# Altium PCB ROLETA2-A1.PcbDoc
Units mm, origin at the board's own origin, x right, y up, seen from the top; angles counter-clockwise.
Board outline 66 x 53 mm, 2 copper layers (Top Layer, Bottom Layer); 71 components, 62 nets, 252 pads, 65 vias.
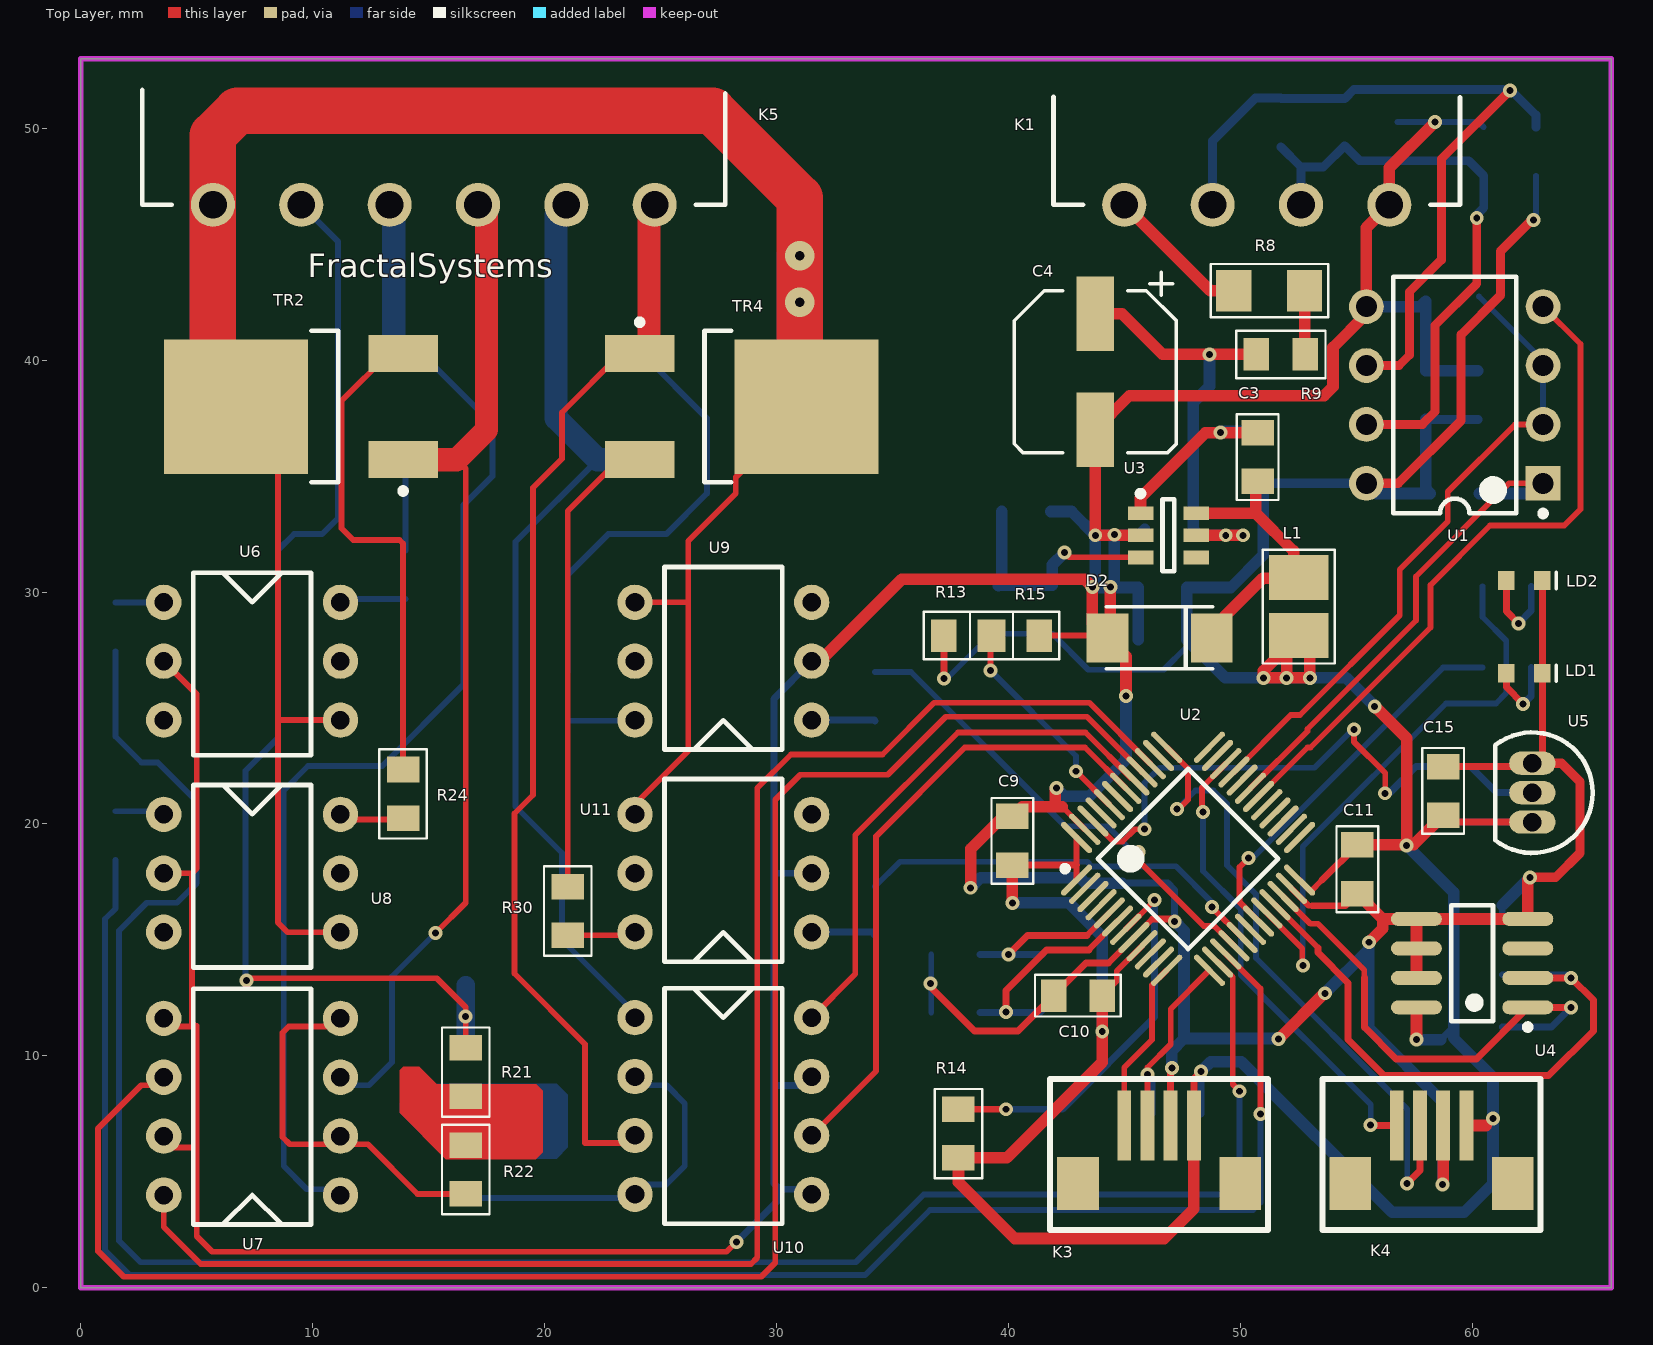
[diagram p0: Top Layer view]
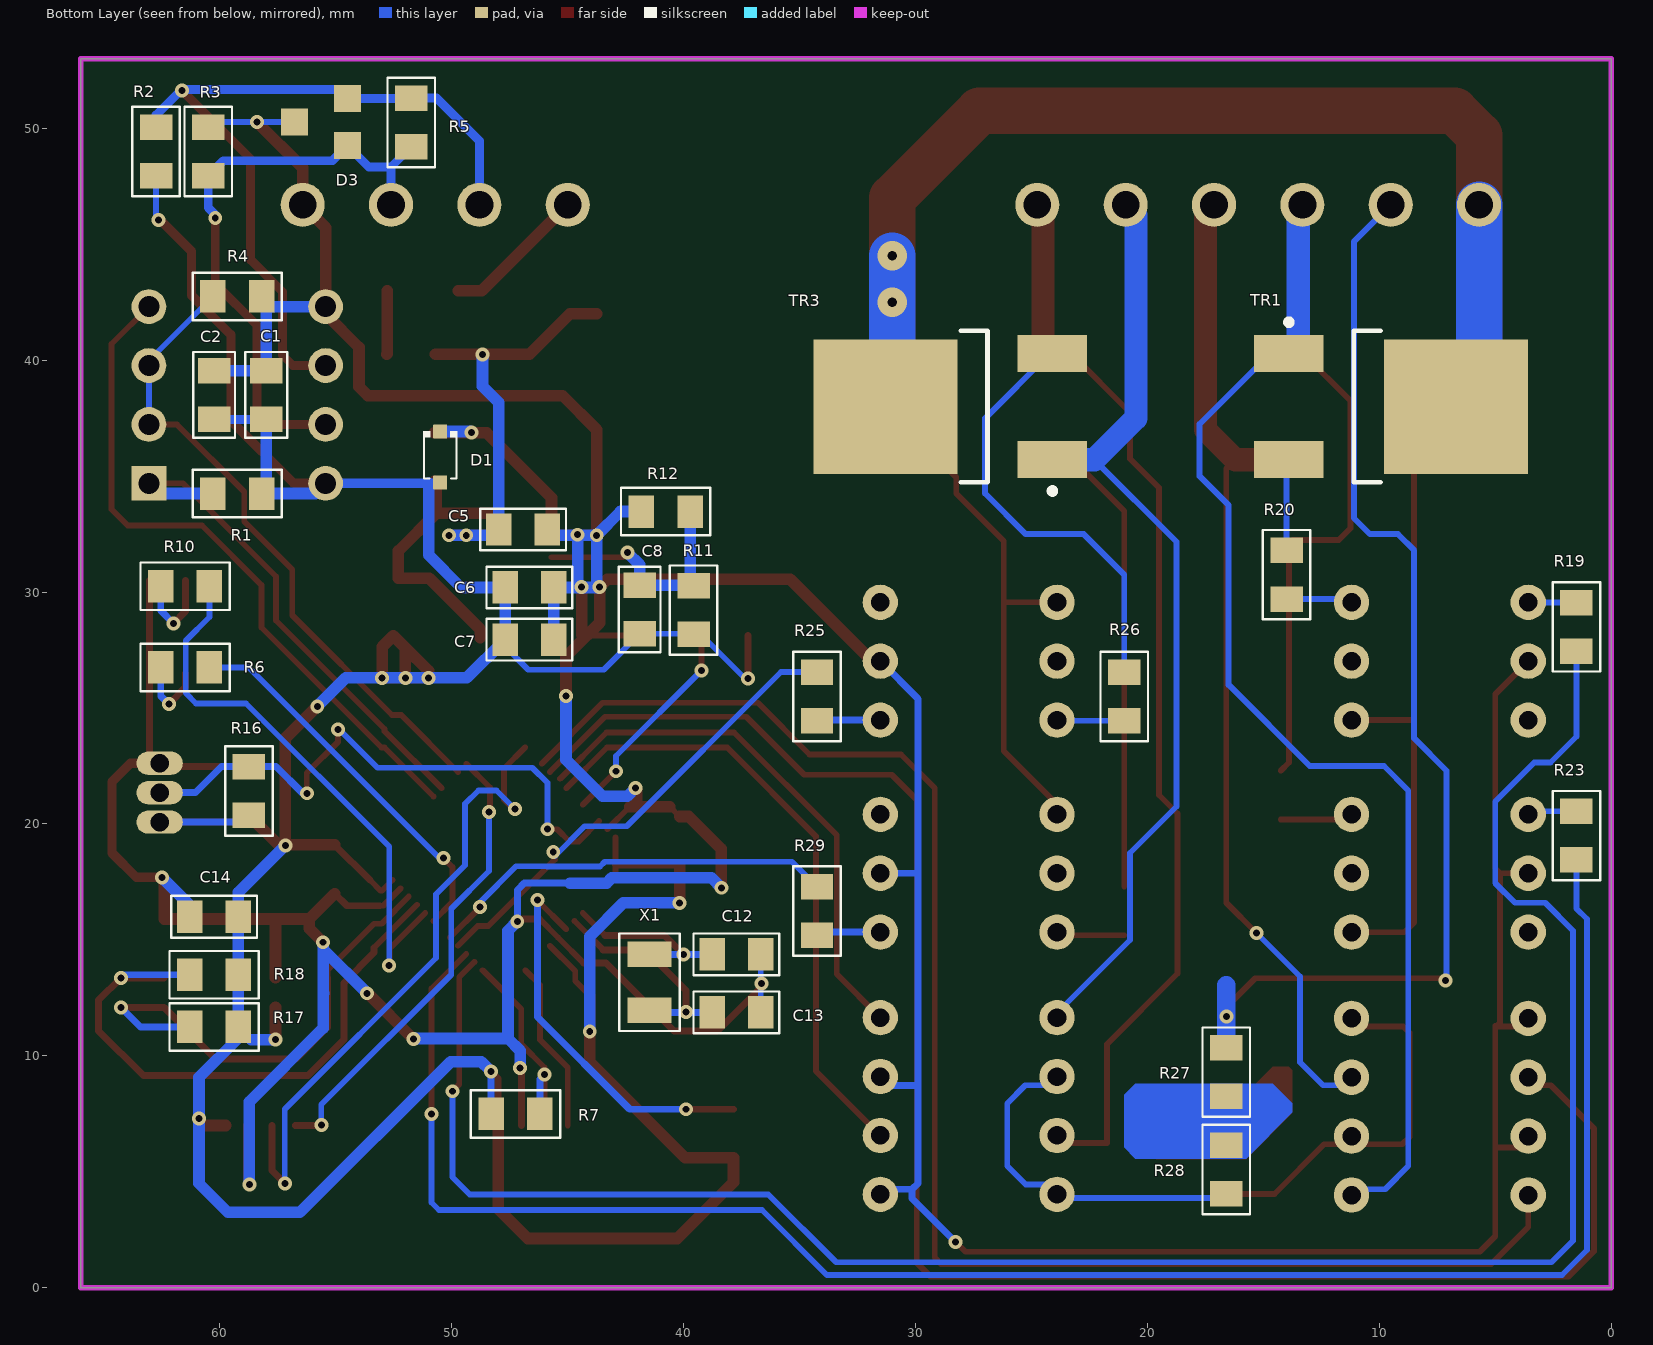
[diagram p1: Bottom Layer view, seen from below]

## Layer stack, top to bottom
Top Solder: solder mask 0.0102, Solder Resist, Dk 3.5
Top Layer: signal copper 0.0356
Dielectric 1: dielectric 0.32, FR-4, Dk 4.8
Bottom Layer: signal copper 0.0356
Bottom Solder: solder mask 0.0102, Solder Resist, Dk 3.5

## Board outline
0,0 66,0 66,53 0,53

## Design rules (kind name [scope] priority, off if disabled: settings)
Clearance ClearanceEdge [All vs OnLayer('Keep-Out Layer')] p1: gap=0.102
Clearance [All] p2: gap=0.203
DiffPairsRouting [All] p1: maxlimit=0.254 minlimit=0.254 mostfreqgap=0.254 toplayer_minwidth=0.381 toplayer_maxwidth=0.381 toplayer_prefwidth=0.381 bottomlayer_minwidth=0.381 bottomlayer_maxwidth=0.381 bottomlayer_prefwidth=0.381 maxuncoupledlength=12.7
HoleSize [All] p1: absolutevalues=TRUE maxlimit=6 minlimit=0.3 maxpercent=80.000 minpercent=20.000
HoleToHoleClearance [All] p1: gap=0.127 allowstackedmicrovias=TRUE
MinimumAnnularRing [All] p1: minimumring=0.15
MinimumSolderMaskSliver SilkscreenOverComponentPads [All] p2: minsoldermaskwidth=0.254
PolygonConnect [All] p1: connectstyle=Relief reliefconductorwidth=0.254 reliefentries=4 polygonreliefangle="90 Angle" airgapwidth=0.254
RoutingVias [All] p1: holewidth=0.711 width=1.27 viastyle="Through Hole" minholewidth=0.711 minwidth=1.27 maxholewidth=0.711 maxwidth=1.27
SolderMaskExpansion [All] p1: expansion=0.1
UnpouredPolygon [All] p1: allowunpoured=FALSE
Width [All] p1: maxlimit=12.7 minlimit=0.203 preferedwidth=0.254
26 further rules are at their usual default settings.

## Classes and differential pairs
component class ROLETA2-A1-P01: C1 C2 C3 C4 C5 C6 C7 C8 C9 C10 C11 C12 C13 C14 C15 D1 D2 D3 K1 K3 K4 L1 LD1 LD2 R1 R2 R3 R4 R5 R6 R7 R8 R9 R10 R11 R12 R13 R14 R15 R16 R17 R18 U1 U2 U3 U4 U5 X1
component class ROLETA2-A1-P02: K5 R19 R20 R21 R22 R23 R24 R25 R26 R27 R28 R29 R30 TR1 TR2 TR3 TR4 U6 U7 U8 U9 U10 U11
differential pair RS485: +RS485_P -RS485_N

## Components (designator, comment, footprint, x,y, rotation, side; value= is the part's Value field where it differs from the comment)
C1 "100n" CC0805-1 58,38.5 r270 bottom
C2 "1u" CC0805-1 60.25,38.5 r270 bottom
C3 "100n" CC0805-1 50.75,35.825 r90 top
C4 "10u" CAPPS-D6.3X7.7 43.75,39.5 r270 top
C5 "1u" CC0805-1 46.925,32.7 r0 bottom
C6 "10u" CC0805-1 46.65,30.2 r0 bottom
C7 "10u" CC0805-1 46.65,27.95 r0 bottom
C8 "DNI" CC0805-1 41.9,29.25 r270 bottom
C9 "100n" CC0805-1 40.175,19.275 r270 top
C10 "100n" CC0805-1 43,12.6 r0 top
C11 "100n" CC0805-1 55.05,18.05 r90 top
C12 "20p" CC0805-1 37.725,14.375 r0 bottom
C13 "20p" CC0805-1 37.725,11.875 r0 bottom
C14 "100n" CC0805-1 60.25,16 r180 bottom
C15 "100n" CC0805-1 58.75,21.425 r270 top
D1 "1N4148" SOD323 50.5,35.825 r90 bottom
D2 "SS110B" DO-214AC 46.525,28.025 r0 top
D3 "PESD12VL2BT" SOT-23_NUP2105L(Primary) 54.5,49.25 r0 bottom
K1 "Terminal Block Connector, 3.81mm, Right Angle" CONN_3.81_4 45,46.7 r0 top locked
K3 "BM04B-SRSS-TB" JST-SH-4pin 46.5,4.5 r180 top locked
K4 "BM04B-SRSS-TB" JST-SH-4pin 58.25,4.5 r180 top locked
K5 "Terminal Block Connector, 3.81mm, Right Angle" CONN_3.81_6 5.7,46.7 r0 top
L1 "10uH" IND-LQH32CN4R7M33l 52.525,29.375 r270 top
LD1 "GREEN" LEDGREENC190 62.25,26.5 r180 top
LD2 "YELLOW" LEDYELLOWC190 62.25,30.5 r180 top
R1 "10K" RC0805-1 59.25,34.25 r180 bottom
R2 "47K" RC0805-1 62.75,49 r270 bottom
R3 "47K" RC0805-1 60.5,49 r270 bottom
R4 "10K" RC0805-1 59.25,42.75 r0 bottom
R5 "DNI" RC0805-1 51.75,50.25 r270 bottom
R6 "470R" RC0805-1 61.5,26.75 r0 bottom
R7 "10K" RC0805-1 47.25,7.5 r180 bottom
R8 "FUSE" RC1206-1 51.25,43 r0 top
R9 "10R" RC0805-1 51.75,40.25 r0 top
R10 "470R" RC0805-1 61.5,30.25 r0 bottom
R11 "31K6" RC0805-1 39.575,29.225 r270 bottom
R12 "10K" RC0805-1 40.775,33.475 r180 bottom
R13 "DNI" RC0805-1 38.275,28.125 r180 top
R14 "10K" RC0805-1 37.85,6.65 r90 top
R15 "10K" RC0805-1 40.275,28.125 r0 top
R16 "10K" RC0805-1 58.75,21.425 r90 bottom
R17 "10K" RC0805-1 60.25,11.25 r0 bottom
R18 "10K" RC0805-1 60.25,13.5 r0 bottom
R19 "470R" RC0805-1 1.5,28.5 r270 bottom
R20 "470R" RC0805-1 14,30.75 r270 bottom
R21 "120K" RC0805-1 16.6,9.3 r90 top
R22 "120K" RC0805-1 16.6,5.1 r90 top
R23 "470R" RC0805-1 1.5,19.5 r270 bottom
R24 "470R" RC0805-1 13.9,21.3 r270 top
R25 "470R" RC0805-1 34.25,25.5 r90 bottom
R26 "470R" RC0805-1 21,25.5 r270 bottom
R27 "120K" RC0805-1 16.6,9.3 r90 bottom
R28 "120K" RC0805-1 16.6,5.1 r90 bottom
R29 "470R" RC0805-1 34.25,16.25 r90 bottom
R30 "470R" RC0805-1 21,16.25 r270 top
TR1 "MAC4DHMT4G" ONSC-DPAK-3-369C-01_V 9.5,38 r180 bottom
TR2 "MAC4DHMT4G" ONSC-DPAK-3-369C-01_V 9.5,38 r180 top
TR3 "MAC4DHMT4G" ONSC-DPAK-3-369C-01_V 28.5,38 r0 bottom
TR4 "MAC4DHMT4G" ONSC-DPAK-3-369C-01_V 28.5,38 r0 top
U1 "SN65HVD08P" P8 59.25,38.5 r180 top
U2 "STM32F030C8T6" STM-LQFP48_N 47.75,18.5 r45 top locked
U3 "MCP16301T-E/CH" MCHP-SOT-23-CH6_N 46.9,32.45 r0 top locked
U4 "LM75AIM" M08A_N 60,14 r180 top
U5 "DS18B20" TO92 62.6,21.35 r180 top
U6 "MOC3023" DIP6 3.58,29.56 r0 top locked
U7 "TLP620" DIP8 11.2,4 r180 top
U8 "MOC3023" DIP6 3.58,20.416 r0 top locked
U9 "MOC3023" DIP6 31.52,24.48 r180 top locked
U10 "TLP620" DIP8 23.9,11.65 r0 top
U11 "MOC3023" DIP6 31.52,15.336 r180 top locked
X1 "8MHz" OSCCC150X320X9-2N 41.475,13.175 r270 bottom

## Footprints (in the part's own frame and the unit in brackets; to place one, negate y for a bottom-side part, rotate by r counter-clockwise, add the part's x,y. Pads: shape width x height; smd on the part's side, far side on the other; paste and mask are expansions set on the pad)
CAPPS-D6.3X7.7 [mm] "Capacitor polarised SMD D6.3; 6.6x6.6x7.7mm"
  rect 3.2x1.6 smd: 1(-2.5,0) 2(2.5,0)
  silkscreen extent -4.3,-3.5 3.5,3.5, body extent -3.3,-3.3 3.3,3.3, height 7.71
CC0805-1 [mm] "Chip capacitor  0805"
  rect 1.1x1.4 smd: 1(-1.05,0) 2(1.05,0)
  silkscreen extent -1.85,-0.9 1.85,0.9, body extent -1,-0.63 1,0.63, height 1
CONN_3.81_4 [mm]
  round 1.9 hole 1.2: 1(0,0) 2(3.81,0) 3(7.62,0) 4(11.43,0)
  silkscreen extent -3.05,0 14.48,4.65
CONN_3.81_6 [mm]
  round 1.9 hole 1.2: 1(0,0) 2(3.81,0) 3(7.62,0) 4(11.43,0) 5(15.24,0) 6(19.05,0)
  silkscreen extent -3.05,0 22.1,4.95
DIP6 [mil]
  round 60 hole 31.5: 1(0,0) 2(0,-100) 3(0,-200) 4(300,-200) 5(300,-100) 6(300,0)
  silkscreen extent 50,-260 250,50
DIP8 [mil]
  round 60 hole 31.5: 1(0,0) 2(0,-100) 3(0,-200) 4(0,-300) 5(300,-300) 6(300,-200) 7(300,-100) 8(300,0)
  silkscreen extent 50,-350 250,50
DO-214AC [mm]
  rect 1.8x2.1 smd: A(-2.25,0) K(2.25,0)
  silkscreen extent -2.3,-1.33 2.3,1.35, body extent -2.3,-1.43 2.3,1.5, height 2.61
IND-LQH32CN4R7M33l [mm] "Inductor,Molded Body;3.20mm L X 2.50mm W X 2.20mm H"
  rect 1.95x2.55 smd: 1(-1.25,0) 2(1.25,0)
  silkscreen extent -2.45,-1.55 2.45,1.55, body extent -1.63,-1.28 1.63,1.28, height 2.2
JST-SH-4pin [mm]
  rect 1.8x2.3 smd: 0(3.5,0) ""(-3.5,0)
  rect 0.6x3 smd: 1(-1.5,-2.5) 2(-0.5,-2.5) 3(0.5,-2.5) 4(1.5,-2.5)
  silkscreen extent -4.7,-4.5 4.7,2
LEDGREENC190 [mm] "LED chip C190 1.6x0.8x0.8mm vertical"
  rect 0.7x0.8 smd: 1(-0.775,0) 2(0.775,0)
  silkscreen extent -1.38,-0.35 -1.37,0.35, body extent -0.8,-0.4 0.8,0.4, height 0.8
LEDYELLOWC190 [mm] "LED chip C190 1.6x0.8x0.8mm vertical"
  rect 0.7x0.8 smd: 1(-0.775,0) 2(0.775,0)
  silkscreen extent -1.38,-0.35 -1.38,0.35, body extent -0.8,-0.4 0.8,0.4, height 0.8
M08A_N [mm] "SOIC, 8-Leads, Body 4.9x3.9mm, Pitch 1.27mm, IPC Medium Density"
  oval 2.2x0.6 smd: 1(-2.4,1.905) 2(-2.4,0.635) 3(-2.4,-0.635) 4(-2.4,-1.905) 5(2.4,-1.905) 6(2.4,-0.635) 7(2.4,0.635) 8(2.4,1.905)
  silkscreen extent -2.53,-2.5 0.9,2.88, body extent -2,-2.5 2,2.5, height 1.75
MCHP-SOT-23-CH6_N [mm] "SOT23, 6-Leads, Body 2.9x1.55mm, Pitch 0.95mm, IPC Medium Density"
  rect 1.1x0.6 smd: 1(-1.2,0.95) 2(-1.2,0) 3(-1.2,-0.95) 4(1.2,-0.95) 5(1.2,0) 6(1.2,0.95)
  silkscreen extent -1.32,-1.55 0.25,1.92, body extent -0.9,-1.55 0.9,1.55, height 1.45
ONSC-DPAK-3-369C-01_V [mm] "DPAK, 3-Leads, Body 6.54x6.095mm, Pitch 2.29mm"
  rect 3x1.6 smd: 1(-4.4,2.29) 3(-4.4,-2.29)
  rect 6.2x5.8 smd: 4(2.8,0)
  silkscreen extent -4.53,-3.27 -0.45,3.76, body extent -1.6,-3.27 4.49,3.27, height 2.38
OSCCC150X320X9-2N [mm] "Oscillator, 1.5mm X 3.2m X 0.9mm"
  rect 1.1x1.9 smd mask+0.051: 1(-1.2,0) 2(1.2,0)
  silkscreen extent -2.1,-1.3 2.1,1.3, body extent -1.6,-0.8 1.5,0.8, height 2.5
P8 [mm] "DIP, 8-Leads, Row Spacing 7.62mm, Pitch 2.54mm, Body 9.6x6.4mm"
  rect 1.5x1.5 hole 0.9: 1(-3.81,3.81)
  round 1.5 hole 0.9: 2(-3.81,1.27) 3(-3.81,-1.27) 4(-3.81,-3.81) 5(3.81,-3.81) 6(3.81,-1.27) 7(3.81,1.27) 8(3.81,3.81)
  silkscreen extent -3.94,-5.1 2.65,5.23, body extent -3.3,-5.08 3.3,5.07, height 5.08
RC0805-1 [mm] "Chip resistor 0805"
  rect 1.1x1.4 smd: 1(-1.05,0) 2(1.05,0)
  silkscreen extent -1.92,-1.02 1.92,1.02, body extent -1.02,-0.64 1.02,0.64, height 0.51
RC1206-1 [mil] "Chip resistor 1206"
  rect 60x70 smd: 1(-60,0) 2(60,0)
  silkscreen extent -99,-45 100,45, body extent -60,-30 60,30, height 22
SOD323 [mm]
  rrect10% 0.6x0.6 smd: 1(1.1,0) 2(-1.1,0)
  silkscreen extent -0.92,-0.75 1.12,0.75, body extent -1.3,-0.67 1.3,0.67, height 0.8
SOT-23_NUP2105L(Primary) [mil]
  rect 46x46 smd: A(0,0) b(0,-80) k(90,-40)
STM-LQFP48_N [mm] "QFP, 48-Leads, Body 7x7mm, Pitch 0.5mm, IPC Medium Density"
  oval 1.8x0.25 smd: 1(-4.05,2.75) 2(-4.05,2.25) 3(-4.05,1.75) 4(-4.05,1.25) 5(-4.05,0.75) 6(-4.05,0.25) 7(-4.05,-0.25) 8(-4.05,-0.75) 9(-4.05,-1.25) 10(-4.05,-1.75) 11(-4.05,-2.25) 12(-4.05,-2.75) 25(4.05,-2.75) 26(4.05,-2.25) 27(4.05,-1.75) 28(4.05,-1.25) 29(4.05,-0.75) 30(4.05,-0.25) 31(4.05,0.25) 32(4.05,0.75) 33(4.05,1.25) 34(4.05,1.75) 35(4.05,2.25) 36(4.05,2.75)
  oval 0.25x1.8 smd: 13(-2.75,-4.05) 14(-2.25,-4.05) 15(-1.75,-4.05) 16(-1.25,-4.05) 17(-0.75,-4.05) 18(-0.25,-4.05) 19(0.25,-4.05) 20(0.75,-4.05) 21(1.25,-4.05) 22(1.75,-4.05) 23(2.25,-4.05) 24(2.75,-4.05) 37(2.75,4.05) 38(2.25,4.05) 39(1.75,4.05) 40(1.25,4.05) 41(0.75,4.05) 42(0.25,4.05) 43(-0.25,4.05) 44(-0.75,4.05) 45(-1.25,4.05) 46(-1.75,4.05) 47(-2.25,4.05) 48(-2.75,4.05)
  silkscreen extent -4.17,-2.75 2.75,3.57, body extent -3.5,-3.5 3.5,3.5, height 1.6
TO92 [mm] "TO92"
  oval 2x1 hole 0.8: 1(0,-1.27) 2(0,0) 3(0,1.27)
  silkscreen extent -2.6,-2.6 1.6,2.6, body extent -2.61,-2.61 1.6,2.61, height 5.33

## Part data
C1 C2 C3 C5 C8: library part CAPCC0805_1U50VX7R, "Capacitor chip ceramic 0805"
C4: library part CAPPS100U25VFP, "Capacitor electrolitic SMD 6.3X6.3X7.7MM low ESR"
C6 C7: library part CAPCC0805_10U16VX5R, "Capacitor chip ceramic 0805"
C9 C10 C11 C12 C13 C14 C15: library part CAPCC0805_100N50VX7R, "Capacitor chip ceramic 0805"
D1: library part D-1N4148WS, "Small Signal Diode"
D2: library part CD214A-B240LF-0.3V@1A, "Schottky Diode"
D3: library part NUP2105L, "Diode"
K1: library part CONN_TB_3.81_4PIN, "Terminal Block Connector, 3.81mm, 4pin"
K3 K4: library part JST-SH-BM04B-SRSS-TB, "JST connector 4pin vertical"
K5: library part CONN_TB_3.81_6PIN, "Terminal Block Connector, 3.81mm, 8pin"
L1: library part LQH44PN100MP0L, "Chip Inductor 4 x 4 mm"
LD1: library part LED-GREEN0603V, "LED green HSMG vertical"
LD2: library part LED-YELLOW0603V, "LED yellow HSMY vertical"
R1 R2 R3 R4 R5 R6 R7 R9 R10 R11 R12 R13 R14 R15 R16 R17 R18 R19 R20 R21 R22 R23 R24 R25 R26 R27 R28 R29 R30: library part RES0805, "Chip Resistor 0805"
R8: library part RES1206, "Chip Resistor 1206"
TR1 TR2 TR3 TR4: "Sensitive Gate Triacs, 3-Pin DPAK, Pb-Free, Tape and Reel"
U1: "3.3 / 5 V RS-485 Transceiver, 10 Mbps, Half Duplex, -40 to 85 degC, 8-pin PDIP (P), Pb-Free (RoHS)"
U2: "ARM Cortex-M0 32-bit MCU, 64 KB Flash, 8 KB Internal RAM, 39 I/Os, 48-pin LQFP, -40 to 85 degC, Tray"
U3: "High-Voltage Input Integrated Switch Step-Down Regulator, 600 mA, Input Voltage 4.0 to 30 V, Output Voltage 2.0 to 15 V, -40 to 125 degC, 6-pin SOT-23 (CH6), Tape and Reel"
U4: "Digital Temperature Sensor and Thermal Watchdog with Two-Wire Interface, 8-pin Narrow SOIC"
U5 U6 U7 U8 U9 U10 U11: "digital temperature sensor"
X1: library part XTAL-SMD_8MHz, "SMD Crystal 8MHz"

## Via types
v1: diameter 0.6, hole 0.3, Top Layer to Bottom Layer, tented both sides, 63 vias
v2: diameter 1.27/1.27 (per signal layer), hole 0.4, Top Layer to Bottom Layer, tented both sides, 2 vias

## Nets (pads, with @x,y where several pads share a name; then routed paths per layer and width w, separated by ;. In a path a pad name is that pad's centre, name@x,y a point inside that pad or via, vN(x,y) a via of type N, cw(c..) or ccw(c..) an arc to the next point about the centre after c; other vN are vias at no path point)
+3V3: C1.2 C2.2 C6.2 C7.2 C8.2 C9.2 C10.2 C11.2 C14.2 C15.2 D1.2 K3.1 K4.1 L1.2 R1.2 R2.2 R7.1 R11.2 R13.2 R14.1 R16.1 R17.1 R18.1 U1.8 U2.1 U2.9 U2.24 U2.48 U4.8 U5.3 | length 179.7
  Top Layer w0.25: U2.1 42.942,18.225 U2.48 ; C10.2 44.675,13.225 44.675,13.657 U2.9 ; U2.24 53.014,17.125 53.075,17.125 53.531,17.581
  Top Layer w0.3: v1@37.2,26.25 v1(37.225,26.275) R13.2 ; C9.2 42.942,18.225 ; C10.2 C10.2@44.05,13.032 ; K3.1 48,9.025 v1(48.3,9.325) ; 53.531,17.581 C11.2 ; C15.2 59.045,20.08 U5.3 ; 60.6,7 v1(60.9,7.3)
  Top Layer w0.4: U1.8 56.815,34.69 59.525,37.4 59.525,41.1 61.225,42.8 61.225,44.7 62.575,46.05 v1(62.65,46.05)
  Top Layer w0.5: v1(40.175,16.6) C9.2 ; C10.2 v1(44.05,11.05) 44.05,9.725 39.925,5.6 R14.1 37.85,4.55 40.275,2.125 46.725,2.125 48,3.4 K3.1 ; C11.2 v1@57.175,19.1 ; v1(55.8,25.075) 57.175,23.7 v1@57.175,19.1 ; v1(57.6,10.7) U4.8 ; C15.2 57.475,19.1 v1@57.175,19.1 ; K4.1 60.6,7 ; v1(52,26.3) L1.2@52,27.6 ; v1(52,26.3) v1(53,26.3) 53,27.65 L1.2 L1.2@52,27.6 ; v1(52,26.3) v1(51,26.3) 51,26.6 L1.2@52,27.6
  Bottom Layer w0.25: v1(37.225,26.275) 37.35,26.275 39.25,28.175 R11.2 39.6,28.2 C8.2 43.45,26.65 46.7,26.65 47.7,27.65 C7.2 ; v1(62.65,46.05) 62.75,46.15 R2.2
  Bottom Layer w0.3: R7.1 v1(48.3,9.325) v1@48.375,9.4 ; R17.1@58.65,10.7 R17.1 ; R16.1 59.045,20.08 U5.3
  Bottom Layer w0.381: C1.2 C2.2
  Bottom Layer w0.4: D1.2 50.535,34.69 51,34.69 U1.8 U1.8@55.88,34.25
  Bottom Layer w0.5: v1(40.175,16.6) 42.6,16.6 44.05,15.15 v1(44.05,11.05) ; v1@48.375,9.4 48.725,9.75 50.05,9.75 56.55,3.25 59.65,3.25 60.9,4.5 v1(60.9,7.3) 60.9,9.075 59.2,10.775 R17.1 C14.2 59.2,17.05 v1(57.175,19.075) ; 51,34.69 51,31.6 49.6,30.2 C6.2 C7.2 49.35,26.3 v1(51,26.3) v1(52,26.3) v1(53,26.3) 54.575,26.3 v1(55.8,25.075) ; U1.8@55.88,34.25 R1.2 58,34.45 C1.2 ; v1(57.6,10.7) R17.1@58.65,10.7
+VCC: K1.1 R8.1 | length 6.3
  Top Layer w0.5: K1.1 48.7,43 R8.1
GND: C1.1 C2.1 C4.2 C5.1 C6.1 C7.1 C9.1 C10.1 C11.1 C12.1 C13.1 C14.1 C15.1 D2.A D3.k K1.4 K3.2 K4.2 LD1.1 LD2.1 R3.1 R4.1 R12.1 R15.2 U1.5 U2.8 U2.23 U2.47 U3.2 U4.4 U4.5 U4.6 U4.7 U5.1 U6.2 U7.5 U7.7 U8.2 U9.2 U10.5 U10.7 U11.2 | length 280.3
  Top Layer w0.25: U7.7@3.58,6.192 3.722,6.05 5,6.05 ; U7.5@3.58,11.272 4.972,11.272 4.8,11.444 4.8,17.876 ; U8.2 4.8,17.876 ; U6.2 5,25.6 5,18.076 4.8,17.876 ; 5,11.3 5,6.05 ; v1(28.275,1.975) 27.85,1.55 5.675,1.55 5,2.225 5,6.05 ; C9.1 C9.1@40.6,20.75 ; R15.2 43.975,28.125 D2.A@44.075,28.225 ; 42.318,20.75 U2.47 ; 44.311,14 U2.8 46.211,15.9 ; U2.23 52.957,16.475 53.125,16.475
  Top Layer w0.3: v1(36.65,13.125) 36.65,12.975 38.55,11.075 40.425,11.075 C10.1 43.35,14 44.311,14 ; 46.211,15.9 47.075,15.9 v1(47.175,15.8) ; K3.2 47,9.425 v1(47.05,9.475) ; 53.125,16.475 54.525,16.475 C11.1 ; C15.1 62.455,22.475 U5.1 63.025,23.045 LD1.1 LD2.1 ; U4.4 62.5,16.005 v1(62.5,17.7)
  Top Layer w0.4: v1(62.5,17.7) 63.6,17.7 64.65,18.75 64.65,21.825 63.855,22.62 U5.1
  Top Layer w0.5: U9.2 31.87,27.02 35.4,30.55 43.3,30.55 v1(43.625,30.225) 43.625,28.675 44.075,28.225 D2.A ; v1(38.375,17.25) 38.375,18.925 39.775,20.325 C9.1 ; C9.1@40.6,20.75 42.025,20.75 ; v1(42.075,21.55) 42.025,21.5 42.025,20.75 ; 42.318,20.75 42.025,20.75 ; v1(44.4,30.225) 44.4,28.15 D2.A ; v1(45.075,25.525) 45.075,27.225 D2.A ; U3.2 v1(43.75,32.45) C4.2 45.225,38.475 53.625,38.475 54,38.85 54,40.55 55.44,41.99 U1.5 55.44,45.71 K1.4 56.43,48.296 v1(58.4,50.266) ; v1(51.65,10.725) 53.625,12.7 v1(53.65,12.7) ; C11.1 56.145,15.905 ; v1(55.55,14.9) 56.145,15.495 56.145,15.905 ; U4.7 U4.6 U4.5 ; v1@58.75,4.525 K4.2 ; v1(62.5,17.7) 62.4,17.6 U4.4 U4.5 ; 56.145,15.905 U4.5
  Bottom Layer w0.25: C13.1 C12.1 ; D3.k v1(58.4,50.266) 60.284,50.266 R3.1
  Bottom Layer w0.3: v1(28.275,1.975) 30.15,3.85 30.15,4.25 ; U10.5@31.52,3.652 30.922,4.25 30.15,4.25 ; U10.7@31.52,8.732 29.968,8.732 29.9,8.8 ; U11.2 29.924,17.876 29.9,17.9 ; U9.2 29.9,25.4 29.9,17.9 ; 44.9,17.45 46.875,17.45 47.175,17.15 v1(47.175,15.8) ; C14.1 C14.1@61.3,16.5 ; 29.9,8.8 29.9,17.9 ; 29.9,8.8 29.9,4.5 30.15,4.25
  Bottom Layer w0.5: v1(38.375,17.25) 38.8,17.675 43.1,17.675 43.325,17.45 44.9,17.45 ; R12.1 42.725,33.475 v1(43.75,32.45) ; v1(42.075,21.55) 42.425,21.2 43.5,21.2 45.075,22.775 v1(45.075,25.525) ; v1(43.625,30.225) 43.75,30.35 v1(43.75,32.45) ; v1@43.725,30.2 C6.1 C7.1 ; v1(44.4,30.225) 44.575,30.4 v1@44.575,32.45 ; v1(44.575,32.475) v1@44.575,32.45 ; C5.1 45.625,32.45 v1@44.575,32.45 ; v1(47.05,9.475) 47.05,10.225 47.575,10.75 ; v1(47.175,15.8) 47.575,15.4 47.575,10.75 ; v1(51.65,10.725) 51.625,10.75 47.575,10.75 ; v1(53.65,12.7) 55.55,14.6 ; U1.5 57.76,42.31 58,42.55 C1.1 C2.1 ; 55.525,12.7 55.55,12.675 ; v1(55.55,14.9) 55.55,14.6 ; v1(58.725,4.45) 58.725,8.025 55.55,11.2 55.55,12.675 ; C14.1@61.3,16.5 v1(62.5,17.7) ; v1(43.75,32.45) v1@44.575,32.45 ; 55.55,12.675 55.55,14.6
I2C_CLK: R18.2 U2.21 U4.2 | length 26.7
  Top Layer w0.25: U2.21 53.35,14.668 53.35,14.663
  Top Layer w0.3: 53.35,14.663 53.35,14.45 54.65,13.15 54.65,10.7 56.2,9.15 63.3,9.15 65.225,11.075 65.225,12.405 v1(64.265,13.365) U4.2
  Bottom Layer w0.3: R18.2 64.13,13.5 v1(64.265,13.365)
I2C_DAT: R17.2 U2.22 U4.1 | length 21
  Top Layer w0.25: U2.22 53.025,15.7 53.35,15.7 55.35,13.7 55.35,13.375
  Top Layer w0.3: 55.35,11.225 55.35,13.375 ; 55.363,11.237 56.725,9.875 60.18,9.875 U4.1 v1(64.265,12.095)
  Bottom Layer w0.3: R17.2 63.42,11.25 v1(64.265,12.095)
INP1: U2.39 U7.8 | length 67.2
  Top Layer w0.25: U7.8@3.58,3.652 3.58,2.62 5.175,1.025 28.9,1.025 29.175,1.3 29.175,21.55 30.625,23 34.575,23 36.8,25.225 43.5,25.225 U2.39
INP2: U2.40 U7.6 | length 77.1
  Top Layer w0.25: U7.6@3.58,8.732 2.607,8.732 0.75,6.875 0.75,1.575 1.85,0.475 29.35,0.475 29.95,1.075 29.95,21.05 31.025,22.125 34.8,22.125 37.3,24.625 43.393,24.625 U2.40
INP3: U2.41 U10.8 | length 23.2
  Top Layer w0.25: U10.8 33.4,13.53 33.4,19.525 37.825,23.95 43.33,23.95 U2.41@45.327,21.952
INP4: U2.42 U10.6 | length 27.1
  Top Layer w0.25: U10.6 34.3,9.35 34.3,19.475 38.125,23.3 43.304,23.3 U2.42
INP5: U2.43
INP6: U2.45
LED1: R6.1 U2.19 | length 16.9
  Top Layer w0.25: v1(50.35,18.525) 49.975,18.15 49.975,16.629 U2.19
  Bottom Layer w0.25: v1@50.35,18.35 v1(50.35,18.525) 50.525,18.525 58.75,26.75 R6.1
LED2: R10.1 U2.20 | length 24.5
  Top Layer w0.25: U2.20 52.675,14.636 v1@52.675,13.975
  Bottom Layer w0.25: v1(52.7,13.9) 52.7,19.025 58.875,25.2 61.025,25.2 61.475,25.65 61.475,27.9 60.45,28.925 R10.1
LINE: K5.1 TR1.4 TR2.4 TR3.4 TR4.4 U6.4 U8.4 U9.4 U11.4 | length 115.8
  Top Layer w0.25: TR2.4 8.5,36.2 8.5,24.5 ; U8.4 8.914,15.336 8.5,15.75 8.5,24.5 ; U6.4 8.52,24.48 8.5,24.5 ; U11.4 23.9,20.85 26.2,23.15 26.2,32.2 28.25,34.25 28.25,34.95 TR4.4 ; U9.4 26.2,29.56
  Top Layer w2: TR2.4 5.7,39 K5.1 5.7,49.7 6.75,50.75 27.25,50.75 31,47 v2(31,44.5) v2(31,42.5) 31,38.3 TR4.4
  Bottom Layer w2: K5.1 5.7,39 TR1.4 ; v2(31,44.5) v2(31,42.5) 31,38.3 TR3.4
N: K5.2 R21.2 R27.2 | length 50.9
  Top Layer w0.25: v1(7.15,13.25) 7.25,13.35 15.35,13.35 16.6,12.1 v1(16.6,11.7) R21.2
  Bottom Layer w0.25: v1(7.15,13.25) 7.1,13.3 7.1,22.3 8.5,23.7 8.5,31.8 9.2,32.5 10.4,32.5 11.1,33.2 11.1,45.11 K5.2
  Bottom Layer w0.8: R27.2 16.6,13.05
NetC3_1: C3.1 D2.K L1.1 U3.6 | length 12.3
  Top Layer w0.5: U3.6 50.675,33.4 ; D2.K 48.775,28.4 50.975,30.6 52.3,30.6 52.3,31.775 50.675,33.4 ; C3.1 50.675,34.7 50.675,33.4
NetC3_2: C3.2 D1.1 U3.1 | length 8.3
  Top Layer w0.5: U3.1 45.7,34.075 48.5,36.875 C3.2
  Bottom Layer w0.5: v1(49.15,36.875) 49.2,36.925 D1.1
NetC4_1: C4.1 C5.2 R9.1 U3.5 | length 19.8
  Top Layer w0.5: C4.1 44.9,42 46.65,40.25 v1(48.675,40.25) R9.1 ; U3.5 v1(49.375,32.45) v1(50.125,32.45)
  Bottom Layer w0.5: v1(48.675,40.25) 48.675,38.875 47.975,38.175 C5.2 48.225,32.45 v1(49.375,32.45) v1(50.125,32.45)
NetC8_1: C8.1 R11.1 R12.2 U3.3 | length 10.5
  Top Layer w0.25: v1(42.425,31.7) 42.625,31.5 U3.3
  Bottom Layer w0.5: R11.1 R11.1@39.6,30.3 ; R12.2 39.725,30.425 R11.1@39.6,30.3 ; v1(42.425,31.7) 41.9,31.175 C8.1 R11.1@39.6,30.3
NetC12_2: C12.2 U2.5 X1.1 | length 7.8
  Top Layer w0.25: 43.389,15.2 U2.5
  Top Layer w0.3: v1(40,14.375) 40.825,15.2 43.389,15.2
  Bottom Layer w0.3: C12.2 v1(40,14.375) X1.1
NetC13_2: C13.2 U2.6 X1.2 | length 9.8
  Top Layer w0.25: 43.471,14.575 U2.6
  Top Layer w0.3: v1(39.9,11.9) 39.9,12.825 41.65,14.575 ; 41.575,14.5 41.65,14.575 ; 43.471,14.575 41.65,14.575
  Bottom Layer w0.3: C13.2 41.375,11.875 X1.2
NetLD1_2: LD1.2 R6.2 | length 3.3
  Top Layer w0.3: LD1.2 61.475,25.9 v1(62.2,25.175)
  Bottom Layer w0.3: v1(62.2,25.175) 62.55,25.525 R6.2
NetLD2_2: LD2.2 R10.2 | length 3.9
  Top Layer w0.3: LD2.2 61.475,29.175 v1(62,28.65)
  Bottom Layer w0.3: v1(62,28.65) 62.55,29.2 R10.2
NetR8_2: R8.2 R9.2 | length 2.8
  Top Layer w0.5: R8.2 52.774,40.276 R9.2
NetR13_1: R13.1 R15.1 U2.44 | length 9.4
  Top Layer w0.25: v1@39.225,26.65 R15.1 ; v1@42.9,22.275 v1(42.914,22.275) U2.44
  Bottom Layer w0.25: v1(39.225,26.625) 42.914,22.936 v1(42.914,22.275)
NetR14_2: R14.2 U2.7 | length 16.9
  Top Layer w0.25: U2.7 v1@46.304,16.7
  Top Layer w0.3: R14.2 v1(39.9,7.7) ; v1@46.304,16.7 v1(46.304,16.721)
  Bottom Layer w0.3: v1(39.9,7.7) 42.325,7.7 46.304,11.679 v1(46.304,16.721)
NetR19_1: R19.1 U6.1 | length 2.1
  Bottom Layer w0.25: R19.1 U6.1@3.57,29.55
NetR20_1: R20.1 TR1.3 | length 4
  Bottom Layer w0.25: TR1.3 14,35.61 R20.1
NetR20_2: R20.2 U6.6 | length 2.9
  Bottom Layer w0.25: U6.6 11.34,29.7 R20.2
NetR21_1: R21.1 R22.2 | length 2.1
  Top Layer w0.25: R22.2 R21.1
NetR22_1: R22.1 U7.2 U7.4 | length 16
  Top Layer w0.25: U7.4@11.2,11.272 8.972,11.272 8.7,11 8.7,6.5 9.008,6.192 12.383,6.192 14.525,4.05 R22.1
NetR23_1: R23.1 U8.1 | length 2.1
  Bottom Layer w0.25: R23.1 3.446,20.55 U8.1
NetR24_1: R24.1 TR2.3 | length 21.9
  Top Layer w0.25: TR2.3 13.29,40.29 11.25,38.25 11.25,32.75 11.75,32.25 13.75,32.25 13.9,32.1 13.9,22.65 R24.1@14.25,22.3
NetR24_2: R24.2 U8.6 | length 3.1
  Top Layer w0.25: U8.6 11.416,20.2 R24.2@14.25,20.2
NetR25_1: R25.1 U9.1 | length 2.7
  Bottom Layer w0.3: U9.1 34.22,24.48 R25.1
NetR26_1: R26.1 TR3.3 | length 19
  Bottom Layer w0.25: R26.1 21,30.75 22.75,32.5 25.25,32.5 27,34.25 27,37.5 24.21,40.29 TR3.3
NetR26_2: R26.2 U9.6 | length 2.9
  Bottom Layer w0.25: R26.2 23.87,24.45 U9.6
NetR27_1: R27.1 R28.2 | length 2.1
  Bottom Layer w0.25: R28.2 R27.1
NetR28_1: R28.1 U10.2 U10.4 | length 15.3
  Bottom Layer w0.25: R28.1 16.775,3.875 23.527,3.875 24.102,4.45 25.25,4.45 26.05,5.25 26.05,7.95 25.268,8.732 U10.2@23.9,8.732
NetR29_1: R29.1 U11.1 | length 2.8
  Bottom Layer w0.3: U11.1 34.114,15.336 R29.1
NetR30_1: R30.1 TR4.3 | length 20.2
  Top Layer w0.25: R30.1 21,33.5 23.21,35.71 TR4.3
NetR30_2: R30.2 U11.6 | length 3
  Top Layer w0.25: R30.2 23.764,15.2 U11.6
ONEW: R16.2 U2.46 U5.2 | length 25.4
  Top Layer w0.25: U2.46 44.525,19.25 44.925,19.25 45.45,19.775 v1(45.875,19.775) ; v1(54.9,24.075) 54.9,23.55 56.25,22.2 v1(56.25,21.325)
  Bottom Layer w0.25: v1(45.875,19.775) 45.875,21.775 46.525,22.425 53.2,22.425 54.85,24.075 v1(54.9,24.075)
  Bottom Layer w0.3: v1(56.25,21.325) 56.425,21.325 57.575,22.475 R16.2 59.925,22.475 61.05,21.35 U5.2
OUT1: R19.2 U2.14 | length 89.3
  Top Layer w0.25: U2.14 49.03,14.045 49.678,13.397 49.678,8.772 v1(49.975,8.475)
  Bottom Layer w0.25: R19.2 1.5,23.775 2.625,22.65 3.325,22.65 5,20.975 5,17.45 4.15,16.6 2.85,16.6 1.65,15.4 1.65,2.025 2.575,1.1 33.425,1.1 36.35,4.025 49.225,4.025 49.975,4.775 v1(49.975,8.475)
OUT2: R23.2 U2.15 | length 79.9
  Top Layer w0.25: U2.15 50.875,12.9 v1(50.875,7.5)
  Bottom Layer w0.25: R23.2 1.5,16.35 1.05,15.9 1.05,1.625 2.125,0.55 33.825,0.55 36.625,3.35 50.55,3.35 50.875,3.675 v1(50.875,7.5)
OUT3: R25.2 U2.16 | length 20.9
  Top Layer w0.25: v1(45.625,18.8) 45.625,18.55 45.55,18.475 48.425,15.6 48.882,15.6 U2.16
  Bottom Layer w0.25: R25.2 35.8,26.55 42.45,19.9 44.275,19.9 45.55,18.625 45.625,18.7 v1(45.625,18.8)
OUT4: R29.2 U2.17 | length 17.8
  Top Layer w0.25: v1@48.775,16.45 v1(48.775,16.414) U2.17
  Bottom Layer w0.25: R29.2 35.325,18.375 43.4,18.375 43.603,18.172 45.885,18.172 45.888,18.175 47.225,18.175 48.775,16.625 v1(48.775,16.414)
OUT5: U2.29
OUT6: U2.32
R1_DOWN: K5.4 TR2.1 U7.3 | length 43.6
  Top Layer w0.25: v1(15.3,15.3) 16.6,16.6 16.6,35.32 16.21,35.71
  Top Layer w1: TR2.1 16.21,35.71 17.5,37 K5.4@17.5,46.33
  Bottom Layer w0.25: U7.3@11.2,8.732 12.432,8.732 13.425,9.725 13.425,13.425 v1(15.3,15.3)
R1_UP: K5.3 TR1.1 U7.1 | length 53.1
  Bottom Layer w0.25: U7.1@11.2,3.652 10.602,4.25 9.75,4.25 8.75,5.25 8.75,21.45 9.8,22.5 13,22.5 16.5,26 16.5,33.75 17.75,35 17.75,37.25 14.71,40.29 TR1.1 TR1.1@13.29,40.29
  Bottom Layer w1: K5.3 13.5,46.52 13.5,40.69 TR1.1
R2_DOWN: K5.6 TR4.1 U10.3 | length 46.9
  Top Layer w0.25: U10.3@23.9,6.192 23.842,6.25 21.75,6.25 21.75,10.5 18.7,13.55 18.7,20.45 19.5,21.25 19.5,34.5 20.75,35.75 20.75,37.75 23.29,40.29 TR4.1
  Top Layer w1: TR4.1 24.5,40.69 24.5,46.45 K5.6
R2_UP: K5.5 TR3.1 U10.1 | length 41.8
  Bottom Layer w0.25: 22.29,35.71 18.75,32.17 18.75,20.75 20.75,18.75 20.75,15 23.9,11.85 U10.1@23.9,11.272
  Bottom Layer w1: K5.5 20.5,46.26 20.5,37.5 22.29,35.71 TR3.1
RS485_N: D3.A K1.3 R3.2 R5.2 U1.7 | length 26.4
  Top Layer w0.381: U1.7 57.855,37.23 58.4,37.775 58.4,41.5 60.2,43.3 v1(60.2,46.125)
  Bottom Layer w0.381: R5.2 52.62,48.33 ; K1.3@53,46.32 K1.3 52.62,48.33 ; v1(60.2,46.125) 60.2,46.275 60.5,46.575 R3.2 59.85,48.6 55.15,48.6 D3.A 53.58,48.33 52.62,48.33
RS485_P: D3.b K1.2 R2.1 R5.1 U1.6 | length 33.9
  Top Layer w0.381: U1.6 56.845,39.77 57.3,40.225 57.3,42.95 58.675,44.325 58.675,48.675 v1(61.625,51.625)
  Bottom Layer w0.381: K1.2 48.81,49.46 50.65,51.3 R5.1 51.768,51.282 D3.b 54.893,51.675 61.65,51.675 62.75,50.575 R2.1
RS485_RX: R1.1 U1.1 U2.31 | length 22.2
  Top Layer w0.25: U2.31 52.896,24 52.896,24.096 57.575,28.775 57.575,30.675 61.59,34.69 U1.1
  Bottom Layer w0.4: U1.1@62.62,34.25 U1.1
  Bottom Layer w0.5: R1.1 U1.1@62.62,34.25
RS485_TX: U1.4 U2.30 | length 29.5
  Top Layer w0.25: U2.30 52.904,23.3 53.025,23.3 58.2,28.475 58.2,30.3 60.775,32.875 63.975,32.875 64.675,33.575 64.675,40.695 U1.4
SWCLK: K4.3 U2.37 | length 28.1
  Top Layer w0.25: U2.37 47.75,22.389 47.75,21.05 v1@47.475,20.775
  Top Layer w0.3: v1(57.2,4.5) 57.75,5.05 K4.3
  Bottom Layer w0.25: v1(47.275,20.65) 48.075,21.45 48.85,21.45 49.425,20.875 49.425,18.225 50.675,16.975 50.675,14.225 57.2,7.7 v1(57.2,4.5)
SWDIO: K4.4 U2.34 | length 20
  Top Layer w0.25: v1@48.35,20.675 48.35,21.575 U2.34
  Top Layer w0.3: v1(55.625,7.025) 55.65,7 K4.4
  Bottom Layer w0.25: v1(48.4,20.525) 48.4,17.975 50.025,16.35 50.025,13.5 55.625,7.9 v1(55.625,7.025)
TX_EN: R4.2 U1.2 U1.3 U2.33 | length 28.1
  Top Layer w0.25: U2.33 52.182,24.7 52.575,24.7 56.875,29 56.875,30.975 58.95,33.05 58.95,34.325 61.855,37.23 U1.2
  Bottom Layer w0.25: R4.2 63.06,39.99 U1.3 U1.2
UART_RX: K3.3 R7.2 U2.13 | length 9.6
  Top Layer w0.25: K3.3 v1(46,9.2) 46,9.5 47,10.5 47,12.022 U2.13
  Bottom Layer w0.3: v1(46,9.2) 46.2,9 R7.2
UART_TX: K3.4 U2.12 | length 7.5
  Top Layer w0.25: K3.4 45,9.5 46.2,10.7 46.2,13.061 U2.12
pads on no net: K3. K3.0 K4. K4.0 U2.2 U2.3 U2.4 U2.10 U2.11 U2.18 U2.25 U2.26 U2.27 U2.28 U2.35 U2.36 U2.38 U3.4 U4.3 U6.3 U6.5 U8.3 U8.5 U9.3 U9.5 U11.3 U11.5

## Keep-outs
Keep-Out Layer:
  the board outline again, w0.254

## Other copper
Top Layer:
  region net NetR21_1: 19.65,8.775 19.925,8.5 19.925,5.85 19.625,5.55 15.75,5.55 13.75,7.55 13.75,9.375 13.9,9.525 14.6,9.525 15.35,8.775
Bottom Layer:
  region net NetR27_1: 20.525,8.8 21,8.325 21,6.05 20.525,5.575 15.75,5.575 13.75,7.575 13.75,7.95 14.6,8.8 15.35,8.8

## Silkscreen, mask and mechanical layers (free items; w line width, h text height)
Top Overlay:
  text "FractalSystems" at 9.8,43.575 h1
Mechanical 1:
  the board outline again, w0.254